# Altium PCB ATTITUDE.PcbDoc
Units mil, origin at the board's own origin, x right, y up, seen from the top; angles counter-clockwise.
Board outline 6000 x 4000 mil, 2 copper layers (Top Layer, Bottom Layer); 6 components, 40 nets, 83 pads, 0 vias.
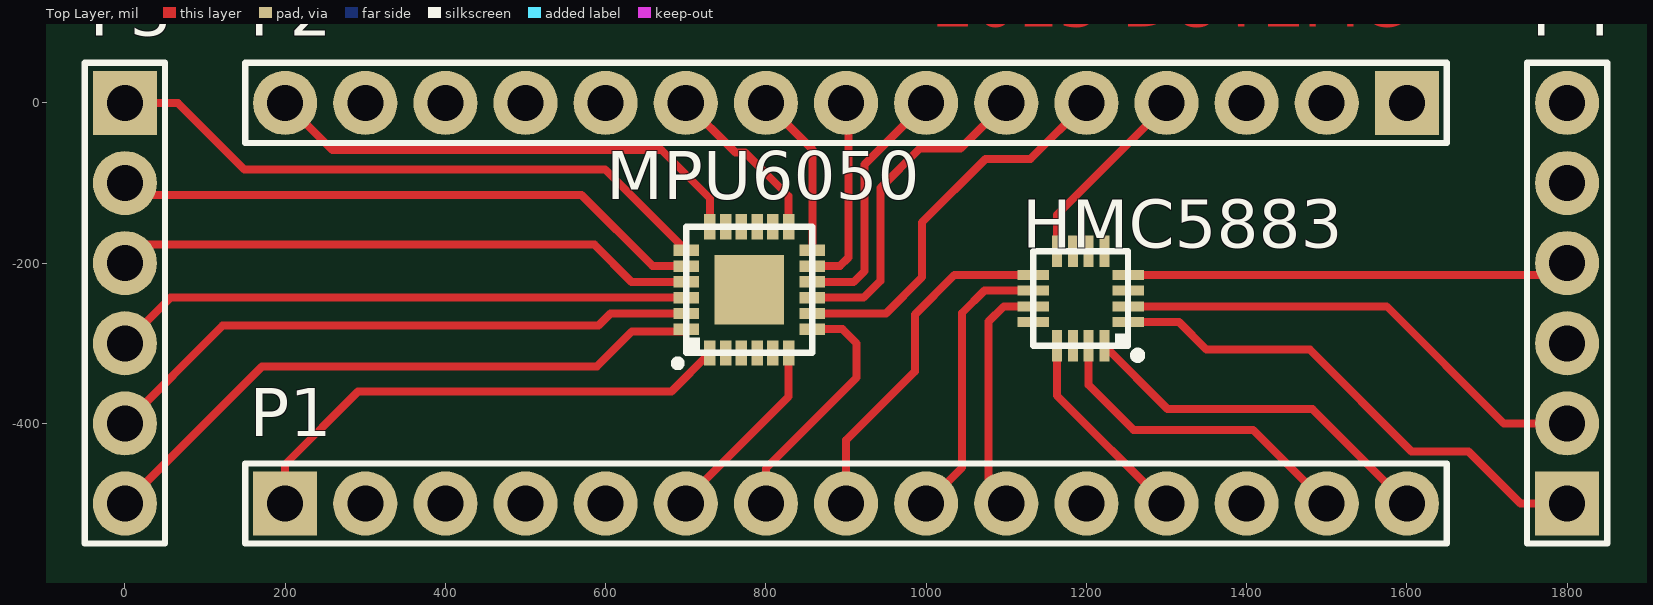
[diagram p0: Top Layer view]
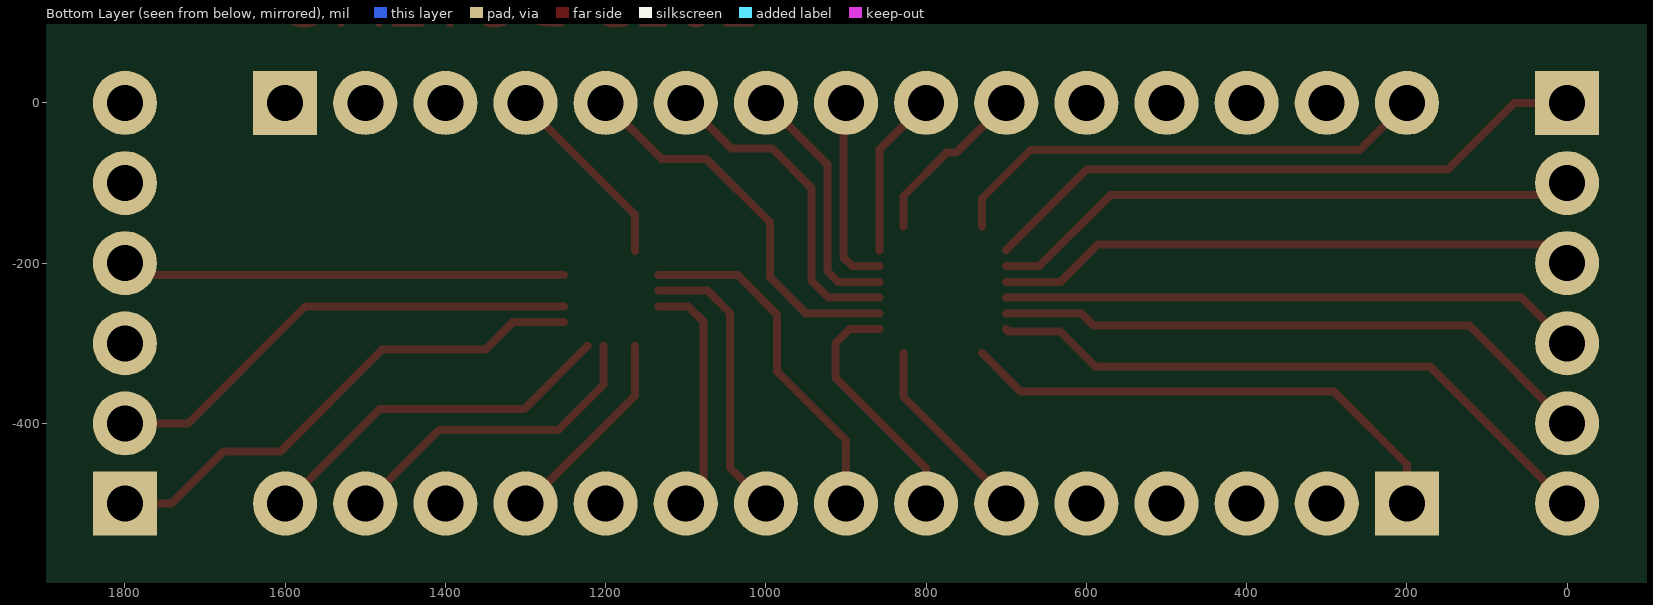
[diagram p1: Bottom Layer view, seen from below]

## Layer stack, top to bottom
Top Solder: solder mask 0.4, Solder Resist, Dk 3.5
Top Layer: signal copper 1.4
Dielectric 1: dielectric 12.6, FR-4, Dk 4.8
Bottom Layer: signal copper 1.4
Bottom Solder: solder mask 0.4, Solder Resist, Dk 3.5

## Board outline
-436,-2862 5564,-2862 5564,1138 -436,1138

## Design rules (kind name [scope] priority, off if disabled: settings)
Clearance Clearance_1 [All] p1: gap=0
Clearance [All] p2: gap=10
PolygonConnect [All] p1: connectstyle=Relief reliefconductorwidth=10 reliefentries=4 polygonreliefangle="90 Angle" airgapwidth=10
RoutingVias [All] p1: holewidth=28 width=50 viastyle="Through Hole" minholewidth=28 minwidth=50 maxholewidth=28 maxwidth=50
SolderMaskExpansion [All] p1: expansion=4
Width [All] p1: maxlimit=10 minlimit=10 preferedwidth=10
29 further rules are at their usual default settings.

## Components (designator, comment, footprint, x,y, rotation, side; value= is the part's Value field where it differs from the comment)
HMC5883 "HMC5883" HMC5883 1252,-185 r180 top
MPU6050 "MPU6050" MPU6050 858,-312 r90 top
P1 "Header 15" HDR1X15 200,-500 r0 top
P2 "Header 15" HDR1X15 1600,0 r180 top
P3 "Header 6" HDR1X6 0,0 r270 top
P4 "Header 6" HDR1X6 1800,-500 r90 top

## Footprints (in the part's own frame and the unit in brackets; to place one, negate y for a bottom-side part, rotate by r counter-clockwise, add the part's x,y. Pads: shape width x height; smd on the part's side, far side on the other; paste and mask are expansions set on the pad)
HDR1X6 [mil] "Connector; Header; 6 Position"
  rect 80x80 hole 45: 1(0,0)
  round 80 hole 45: 2(100,0) 3(200,0) 4(300,0) 5(400,0) 6(500,0)
  silkscreen extent -50,-50 550,50
HDR1X15 [mil] "Connector; Header; 15 Position"
  rect 80x80 hole 45: 1(0,0)
  round 80 hole 45: 2(100,0) 3(200,0) 4(300,0) 5(400,0) 6(500,0) 7(600,0) 8(700,0) 9(800,0) 10(900,0) 11(1000,0) 12(1100,0) 13(1200,0) 14(1300,0) 15(1400,0)
  silkscreen extent -50,-50 1450,50
HMC5883 [mm]
  rect 1x0.32 smd: 1(0,2.25) 2(0,1.75) 3(0,1.25) 4(0,0.75) 9(3,0.75) 10(3,1.25) 11(3,1.75) 12(3,2.25)
  rect 0.32x1 smd: 5(0.75,0) 6(1.25,0) 7(1.75,0) 8(2.25,0) 13(2.25,3) 14(1.75,3) 15(1.25,3) 16(0.75,3)
  silkscreen extent -0.42,0 3,3.42
MPU6050 [mm]
  rect 0.8x0.36 smd: 1(0,3.25) 2(0,2.75) 3(0,2.25) 4(0,1.75) 5(0,1.25) 6(0,0.75) 13(4,0.75) 14(4,1.25) 15(4,1.75) 16(4,2.25) 17(4,2.75) 18(4,3.25)
  rect 0.36x0.8 smd: 7(0.75,0) 8(1.25,0) 9(1.75,0) 10(2.25,0) 11(2.75,0) 12(3.25,0) 19(3.25,4) 20(2.75,4) 21(2.25,4) 22(1.75,4) 23(1.25,4) 24(0.75,4)
  rect 2.2x2.2 smd: 25(2,2)
  silkscreen extent -0.42,0 4,4.36

## Part data
HMC5883 MPU6050: library part Component_1
P1 P2: "Header, 15-Pin"
P3 P4: "Header, 6-Pin"

## Nets (pads, with @x,y where several pads share a name; then routed paths per layer and width w, separated by ;. In a path a pad name is that pad's centre, name@x,y a point inside that pad or via, vN(x,y) a via of type N, cw(c..) or ccw(c..) an arc to the next point about the centre after c; other vN are vias at no path point)
HMC_1: HMC5883.1 P4.1 | length 641.8
  Top Layer w10: HMC5883.1 1315.58,-273.58 1350,-308 1479,-308 1606,-435 1677,-435 1742,-500 P4.1
HMC_2: HMC5883.2 P4.2 | length 608.5
  Top Layer w10: HMC5883.2 1574.9,-253.9 1721,-400 P4.2
HMC_3: P4.3
HMC_4: HMC5883.4 P4.4 | length 554
  Top Layer w10: HMC5883.4 1785.47,-214.53 P4.4
HMC_5: P2.1
HMC_6: P2.2
HMC_7: P2.3
HMC_8: HMC5883.8 P2.4 | length 241.6
  Top Layer w10: HMC5883.8 1163.42,-139.58 1300,-3 P2.4
HMC_9: HMC5883.9 P1.8 | length 440
  Top Layer w10: P1.8 900,-421 986,-335 986,-264 1035.47,-214.53 HMC5883.9
HMC_10: HMC5883.10 P1.9 | length 357
  Top Layer w10: P1.9 1045,-455 1045,-262 1072.79,-234.21 HMC5883.10
HMC_11: HMC5883.11 P1.10 | length 299.9
  Top Layer w10: P1.10 1078,-478 1078,-273 1097.1,-253.9 HMC5883.11
HMC_12: P1.11
HMC_13: HMC5883.13 P1.12 | length 254.6
  Top Layer w10: HMC5883.13 1163.42,-365.42 1298,-500 P1.12
HMC_14: P1.13
HMC_15: HMC5883.15 P1.14 | length 407.3
  Top Layer w10: HMC5883.15 1202.79,-351.79 1259,-408 1408,-408 P1.14
HMC_16: HMC5883.16 P1.15 | length 459.1
  Top Layer w10: HMC5883.16 1301.36,-382 1482,-382 P1.15
MPU_1: MPU6050.1 P1.1 | length 636.6
  Top Layer w10: P1.1 200,-451 291,-360 682.05,-360 MPU6050.1
MPU_2: P1.2
MPU_3: P1.3
MPU_4: P1.4
MPU_5: P1.5
MPU_6: MPU6050.6 P1.6 | length 241.2
  Top Layer w10: P1.6 700,-495 828.47,-366.53 MPU6050.6
MPU_7: MPU6050.7 P1.7 | length 309.1
  Top Layer w10: P1.7 800,-456 913,-343 913,-300 895.47,-282.47 MPU6050.7
MPU_8: MPU6050.8 P2.5 | length 491
  Top Layer w10: MPU6050.8 949.79,-262.79 995,-217.57 995,-149 1074,-70 1130,-70 P2.5
MPU_9: MPU6050.9 P2.6 | length 410.6
  Top Layer w10: MPU6050.9 921.9,-243.1 943,-222 943,-106 992,-57 1043,-57 P2.6
MPU_10: MPU6050.10 P2.7 | length 312.5
  Top Layer w10: MPU6050.10 909.58,-223.42 923,-210 923,-77 P2.7
MPU_11: MPU6050.11 P2.8 | length 243.7
  Top Layer w10: MPU6050.11 892.27,-203.73 903,-193 903,-3 P2.8
MPU_12: MPU6050.12 P2.9 | length 208.1
  Top Layer w10: P2.9 858,-58 MPU6050.12
MPU_13: MPU6050.13 P2.10 | length 214.8
  Top Layer w10: P2.10 762,-62 774,-62 828.47,-116.47 MPU6050.13
MPU_14: P2.11
MPU_15: P2.12
MPU_16: P2.13
MPU_17: P2.14
MPU_18: MPU6050.18 P2.15 | length 614.8
  Top Layer w10: P2.15 259,-59 670,-59 730.05,-119.05 MPU6050.18
MPU_19: MPU6050.19 P3.1 | length 776.8
  Top Layer w10: P3.1 66,0 149,-83 599.47,-83 MPU6050.19
MPU_20: MPU6050.20 P3.2 | length 743.5
  Top Layer w10: P3.2 15,-115 570,-115 658.73,-203.73 MPU6050.20
MPU_21: MPU6050.21 P3.3 | length 729.3
  Top Layer w10: P3.3 23,-177 586,-177 632.42,-223.42 MPU6050.21
MPU_22: MPU6050.22 P3.4 | length 724.1
  Top Layer w10: P3.4 56.9,-243.1 MPU6050.22
MPU_23: MPU6050.23 P3.5 | length 757.4
  Top Layer w10: P3.5 122,-278 591,-278 606.21,-262.79 MPU6050.23
MPU_24: MPU6050.24 P3.6 | length 790.6
  Top Layer w10: P3.6 171,-329 589,-329 633,-285 697.99,-285 MPU6050.24
pads on no net: HMC5883.3 HMC5883.5 HMC5883.6 HMC5883.7 HMC5883.12 HMC5883.14 MPU6050.2 MPU6050.3 MPU6050.4 MPU6050.5 MPU6050.14 MPU6050.15 MPU6050.16 MPU6050.17 MPU6050.25 P4.5 P4.6

## Other copper
Top Layer:
  text "2015 DUTEMC" at 1008,95 h60